# Altium PCB jtag-pcb.PcbDoc
Units mm, origin at the board's own origin, x right, y up, seen from the top; angles counter-clockwise.
Board outline 22 x 48 mm, 2 copper layers (Top Layer, Bottom Layer); 32 components, 31 nets, 176 pads, 59 vias.
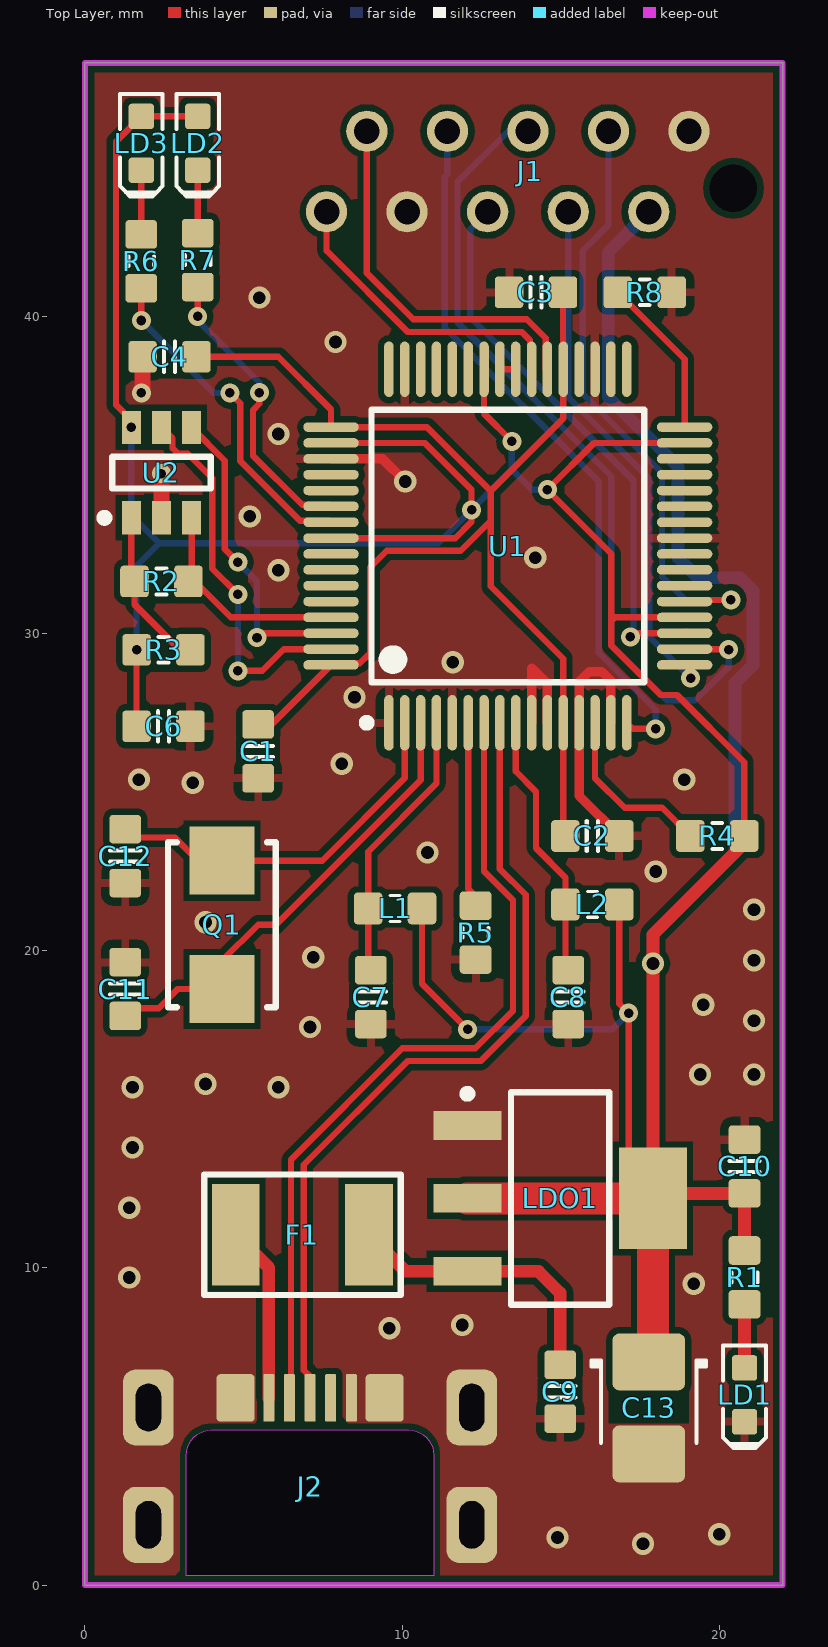
[diagram p0: Top Layer view]
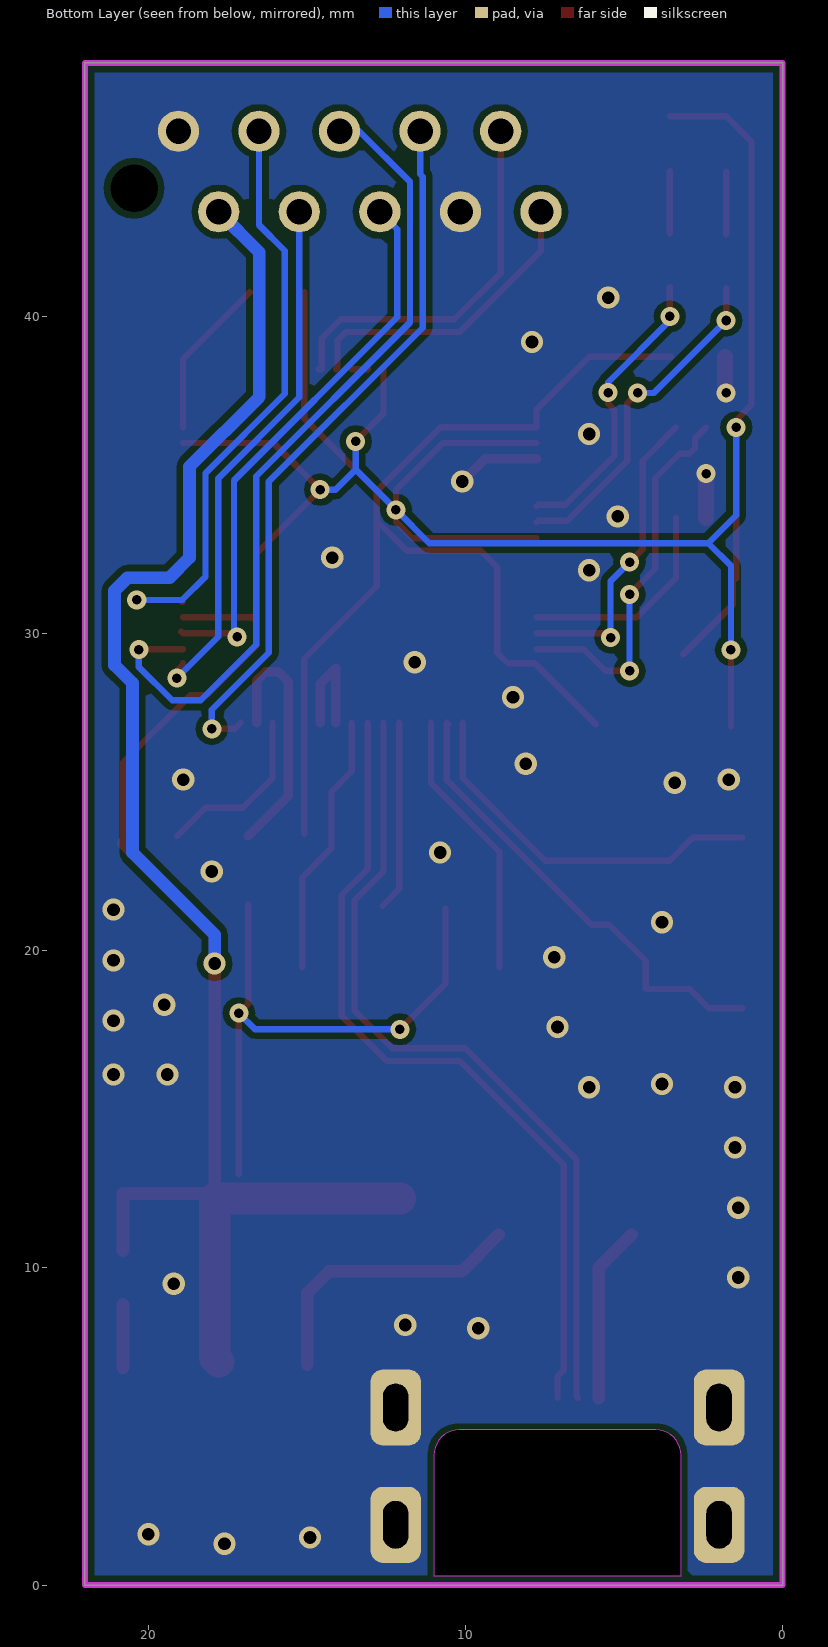
[diagram p1: Bottom Layer view, seen from below]

## Layer stack, top to bottom
Top Solder: solder mask 0.0102, Solder Resist, Dk 3.5
Top Layer: signal copper 0.0356
Dielectric 1: dielectric 0.32, FR-4, Dk 4.8
Bottom Layer: signal copper 0.0356
Bottom Solder: solder mask 0.0102, Solder Resist, Dk 3.5

## Board outline
0,0 22,0 22,48 0,48

## Design rules (kind name [scope] priority, off if disabled: settings)
Clearance [All] p1: gap=0.2
HoleSize [All] p1: absolutevalues=TRUE maxlimit=10 minlimit=0.1 maxpercent=80.000 minpercent=20.000
MinimumSolderMaskSliver [All] p1: minsoldermaskwidth=0.05
PasteMaskExpansion [All] p1: expansion=0.1
PolygonConnect PolygonConnectDirectConnect [All vs IsVia or InComponent('J2') or InComponent('C13') or InComponent('J1') or InComponent('LDO1')] p1: connectstyle=Direct reliefconductorwidth=0.254 reliefentries=4 polygonreliefangle="90 Angle" airgapwidth=0.254
PolygonConnect [All] p2: connectstyle=Relief reliefconductorwidth=0.254 reliefentries=4 polygonreliefangle="90 Angle" airgapwidth=0.254
RoutingVias [All] p1: holewidth=0.3 width=0.6 viastyle="Through Hole" minholewidth=0.3 minwidth=0.6 maxholewidth=3 maxwidth=6
SolderMaskExpansion [All] p1: expansion=0.102
UnpouredPolygon [All] p1: allowunpoured=FALSE
Width [All] p1: maxlimit=3 minlimit=0.2 preferedwidth=0.2
26 further rules are at their usual default settings.

## Components (designator, comment, footprint, x,y, rotation, side; value= is the part's Value field where it differs from the comment)
C1 "100nF" CAPC1608X90N 5.461,26.289 r270 top
C2 "100nF" CAPC1608X90N 16.002,23.622 r0 top
C3 "100nF" CAPC1608X90N 14.224,40.767 r180 top
C4 "3.3uF" CAPC1608X90N 2.667,38.735 r180 top
C6 "100nF" CAPC1608X90N 2.478,27.079 r180 top
C7 "4.7uF" CAPC1608X90N 9.017,18.542 r270 top
C8 "4.7uF" CAPC1608X90N 15.24,18.542 r270 top
C9 "1uF" CAPC1608X90N 14.986,6.096 r270 top
C10 "0.1uF" CAPC1608X90N 20.8,13.2 r90 top
C11 "18pF" CAPC1608X90N 1.27,18.796 r90 top
C12 "18pF" CAPC1608X90N 1.27,22.987 r90 top
C13 "100µ" CAPMP3528X210N 17.78,5.588 r270 top
F1 "MF-MSMF050-2 PTC" PTC-1218 6.858,11.049 r0 top
J1 "HEADER-10" MICRO-MATCH-10 19.05,45.847 r0 top
J2 "USB Micro Type B (recommended if hand soldering)" USB_Micro-B_FCI_SMD 7.1,0.3 r0 top
L1 "120R @ 100 MHz" INDC1608N 9.779,21.336 r0 top
L2 "120R @ 100 MHz" INDC1608N 16.002,21.463 r0 top
LD1 "Red" LED-0603-RED 20.8,6 r270 top
LD2 "Red" LED-0603-RED 3.556,45.466 r270 top
LD3 "Red" LED-0603-RED 1.778,45.466 r270 top
LDO1 "TLV1117-33CDCY" SOT223 14.986,12.192 r0 top
Q1 "12MHz" XTAL-5x3.2 4.318,20.821 r90 top
R1 "Thick Film" RESC1608X55N 20.8,9.7 r270 top
R2 "Thick Film" RESC1608X55N 2.413,31.651 r180 top
R3 "Thick Film" RESC1608X55N 2.478,29.492 r180 top
R4 "Thick Film" RESC1608X55N 19.939,23.622 r0 top
R5 "Thick Film" RESC1608X55N 12.319,20.574 r90 top
R6 "Thick Film" RESC1608X55N 1.778,41.744 r270 top
R7 "Thick Film" RESC1608X55N 3.556,41.783 r270 top
R8 "Thick Film" RESC1608X55N 17.653,40.767 r180 top
U1 "IC_FT2232HL" LQFP-64 13.335,32.766 r90 top
U2 "EEPROM-SOT23-6" SOT23-6-EEPROM 2.413,35.08 r90 top

## Footprints (in the part's own frame and the unit in brackets; to place one, negate y for a bottom-side part, rotate by r counter-clockwise, add the part's x,y. Pads: shape width x height; smd on the part's side, far side on the other; paste and mask are expansions set on the pad)
CAPC1608X90N [mm] "Chip Capacitor, Body 1.6x0.8mm, EIA 0603, IPC Medium Density"
  round 0.254 on Mech15: 0(0,0)
  rrect25% 0.9x1 smd: 1(-0.85,0) 2(0.85,0)
  Top Layer pour cut-out: -0.6,0.5 -0.4,0.7 0.4,0.7 0.6,0.5 0.6,-0.5 0.4,-0.7 -0.4,-0.7 -0.6,-0.5
  silkscreen extent -0.18,-0.48 0.18,0.48, body extent -0.85,-0.45 0.85,0.45, height 0.89
CAPMP3528X210N [mm] "Molded body capacitor, Body 3.5x2.8mm, 1210, IPC Nominal settings"
  round 0.254 on Mech15: 0(0,0)
  rrect25% 1.8x2.3 smd: 1(-1.45,0) 2(1.45,0)
  Top Layer pour cut-out: -0.508,1.27 0.508,1.27 0.508,-1.27 -0.508,-1.27
  silkscreen extent -1.5,-1.8 1.1,1.8, body extent -1.75,-1.4 1.75,1.4, height 2.1
INDC1608N [mm] "Chip bead, Body 1.6x0.8mm, 0603, IPC Medium Density"
  round 0.254 on Mech15: 0(0,0)
  rrect25% 0.9x1 smd: 1(-0.85,0) 2(0.85,0)
  Top Layer pour cut-out: -0.4,0.6 0.4,0.6 0.4,-0.6 -0.4,-0.6
  silkscreen extent -0.15,-0.41 0.15,0.41, body extent -0.8,-0.4 0.8,0.4, height 0.79
LED-0603-RED [mm]
  round 0.254 on Mech15: 0(0,0)
  rrect25% 0.8x0.8 smd: A(-0.85,0) K(0.85,0)
  Top Layer pour cut-out: -0.5,0.5 0.5,0.5 0.5,-0.5 -0.5,-0.5
  silkscreen extent -1.55,-0.67 1.68,0.67, body extent -0.8,-0.4 0.8,0.4, height 0.75
LQFP-64 [mm] "64-Pin LQFP 0.5 mm Pitch"
  oval 1.75x0.3 smd: 1(-5.575,3.75) 2(-5.575,3.25) 3(-5.575,2.75) 4(-5.575,2.25) 5(-5.575,1.75) 6(-5.575,1.25) 7(-5.575,0.75) 8(-5.575,0.25) 9(-5.575,-0.25) 10(-5.575,-0.75) 11(-5.575,-1.25) 12(-5.575,-1.75) 13(-5.575,-2.25) 14(-5.575,-2.75) 15(-5.575,-3.25) 16(-5.575,-3.75) 33(5.575,-3.75) 34(5.575,-3.25) 35(5.575,-2.75) 36(5.575,-2.25) 37(5.575,-1.75) 38(5.575,-1.25) 39(5.575,-0.75) 40(5.575,-0.25) 41(5.575,0.25) 42(5.575,0.75) 43(5.575,1.25) 44(5.575,1.75) 45(5.575,2.25) 46(5.575,2.75) 47(5.575,3.25) 48(5.575,3.75)
  oval 0.3x1.75 smd: 17(-3.75,-5.575) 18(-3.25,-5.575) 19(-2.75,-5.575) 20(-2.25,-5.575) 21(-1.75,-5.575) 22(-1.25,-5.575) 23(-0.75,-5.575) 24(-0.25,-5.575) 25(0.25,-5.575) 26(0.75,-5.575) 27(1.25,-5.575) 28(1.75,-5.575) 29(2.25,-5.575) 30(2.75,-5.575) 31(3.25,-5.575) 32(3.75,-5.575) 49(3.75,5.575) 50(3.25,5.575) 51(2.75,5.575) 52(2.25,5.575) 53(1.75,5.575) 54(1.25,5.575) 55(0.75,5.575) 56(0.25,5.575) 57(-0.25,5.575) 58(-0.75,5.575) 59(-1.25,5.575) 60(-1.75,5.575) 61(-2.25,5.575) 62(-2.75,5.575) 63(-3.25,5.575) 64(-3.75,5.575)
  silkscreen extent -5.7,-4.3 4.3,4.57, body extent -5,-5 5,5, height 1.6
MICRO-MATCH-10 [mm]
  round 1.3 hole 0.8: 1(0,0) 2(-1.27,-2.54) 3(-2.54,0) 4(-3.81,-2.54) 5(-5.08,0) 6(-6.35,-2.54) 7(-7.62,0) 8(-8.89,-2.54)
  round 1.3 hole 0.8 unplated: 9(-10.16,0) 10(-11.43,-2.54)
  round 0 hole 1.5 unplated: drill(1.4,-1.8)
PTC-1218 [mm]
  rect 1.5x3.2 smd: 1(-2.1,0) 2(2.1,0)
  silkscreen extent -3.1,-1.9 3.1,1.9
RESC1608X55N [mm] "Chip Resistor, Body 1.6x0.8mm, EIA 0603, IPC Medium Density"
  round 0.254 on Mech15: 0(0,0)
  rrect25% 0.9x1 smd: 1(-0.85,0) 2(0.85,0)
  Top Layer pour cut-out: -0.6,0.5 -0.4,0.7 0.4,0.7 0.6,0.5 0.6,-0.5 0.4,-0.7 -0.4,-0.7 -0.6,-0.5
  silkscreen extent -0.15,-0.41 0.15,0.41, body extent -0.87,-0.47 0.88,0.48, height 0.54
SOT23-6-EEPROM [mm] "SOT23, 6-Leads, Body 2,90x2,70mm, Pitch 0,95mm, IPC Medium Density"
  rect 1.05x0.6 smd: 1(-1.425,0.95) 2(-1.425,0) 3(-1.425,-0.95) 4(1.425,-0.95) 5(1.425,0) 6(1.425,0.95)
  silkscreen extent -1.55,-1.55 0.5,1.92, body extent -0.9,-1.55 0.9,1.55, height 1.45
SOT223 [mm] "SOT223, 4-Leads, Body 6,50x7,00mm (avg), Pitch 2,30mm, IPC Medium Density"
  rect 2.15x0.9 smd: 1(-2.925,2.3) 2(-2.925,0) 3(-2.925,-2.3)
  rect 2.15x3.2 smd: 4(2.925,0)
  silkscreen extent -3.05,-3.35 1.55,3.42, body extent -1.85,-3.35 1.85,3.35, height 1.8
USB_Micro-B_FCI_SMD [mm]
  round 0.508 on Mech15: 0(0,0)
  rrect20% 0.35x1.5 smd: 1(-1.3,5.6) 2(-0.65,5.6) 3(0,5.6) 4(0.65,5.6) 5(1.3,5.6)
  rrect50% 1.6x2.4 hole 0.8 slot 1.5 at 90 deg: SH(-5.1,1.6) SH(-5.1,5.3) SH(5.1,1.6) SH(5.1,5.3)
  rrect20% 1.2x1.5 smd: SH(-2.35,5.6) SH(2.35,5.6)
  Keep-Out Layer board cut-out: -3.9,0 -3.9,3.797 -3.839,4.103 -3.666,4.362 -3.406,4.536 -3.1,4.597 -3.1,4.597 3.1,4.597 3.406,4.536 3.666,4.362 3.839,4.103 3.9,3.797 3.9,3.797 3.9,0
  body extent -5.35,-21.58 5.35,5.8, height 4.67
XTAL-5x3.2 [mm] "Molded Inductor, 2-Leads, Body 5,00x3,20mm, IPC Medium Density"
  rect 2.15x2.05 smd: 1(-2.025,0) 2(2.025,0)
  silkscreen extent -2.6,-1.7 2.6,1.7, body extent -2.57,-1.68 2.58,1.68, height 1.35

## Part data
C1 C2 C3 C4 C6 C7 C8 C9 C10 C11 C12: library part CAPC_39p_0603_NP0_100V_1%, "Capacitor SMD Cer 39pF 1% 100V NP0 0603"
C13: library part CAPT_100u_1210_6V3, "Capacitor SMD Tantalum 100uF 20% 6.3V 1210"
J2: library part USB_Micro_TypeB_FCI, "Connector SMD-THD USB Micro Type B middle mount"
L1 L2: library part FERRITE_120R-100MHz_0603, "Ferrite bead 120 Ohm at 100 MHz 2A 0603 SMD"
LD1 LD2 LD3: library part LED_SMD_Red_0603_220mcd, "LED 0603 SMD Hyper Red 630nm 220mcd 20mA"
Q1: library part XTAL_5x3.2
R1 R2 R3 R4 R5 R6 R7 R8: library part RES_1K_0603_5%, "Resistor SMD chip 1k Ohm 0.1W 5% 0603"
U1: "Dual High Speed USB to Multipurpose UART/FIFO"

## Via types
v1: diameter 0.7, hole 0.4, Top Layer to Bottom Layer, 37 vias
v2: diameter 0.6, hole 0.3, Top Layer to Bottom Layer, 22 vias

## Nets (pads, with @x,y where several pads share a name; then routed paths per layer and width w, separated by ;. In a path a pad name is that pad's centre, name@x,y a point inside that pad or via, vN(x,y) a via of type N, cw(c..) or ccw(c..) an arc to the next point about the centre after c; other vN are vias at no path point)
DM: J2.2 U1.7 | length 25.9
  Top Layer w0.2: J2.2 6.5,5.95 6.5,13.416 10.01,16.926 12.314,16.926 13.5,18.112 13.5,21.6 12.585,22.515 U1.7
DP: J2.3 U1.8 | length 26
  Top Layer w0.2: J2.3 7.1,6.579 6.9,6.779 6.9,13.25 10.176,16.526 12.479,16.526 13.9,17.947 13.9,21.766 13.085,22.581 U1.8
FTDI_CLK: U1.62 U2.4 | length 9.9
  Top Layer w0.2: U2.4 4.413,35.455 4.413,32.671 v2(4.826,32.258) ; v2(5.426,29.88) 5.562,30.016 U1.62
  Bottom Layer w0.2: v2(4.826,32.258) 5.426,31.658 v2(5.426,29.88)
FTDI_CS: U1.63 U2.5 | length 12.1
  Top Layer w0.2: U2.5 2.763,36.155 2.763,35.845 2.774,35.845 2.939,35.68 3.238,35.68 4.013,34.905 4.013,32.055 v2(4.826,31.242) ; v2(4.826,28.829) 5.588,28.829 6.275,29.516 U1.63
  Bottom Layer w0.2: v2(4.826,28.829) v2(4.826,31.242)
FTDI_DATA: R2.1 U1.61 U2.3 | length 6.8
  Top Layer w0.2: U2.3 3.363,31.751 4.598,30.516 U1.61
GND: C1.2 C2.2 C3.2 C4.2 C6.1 C7.2 C8.2 C9.2 C10.2 C11.2 C12.1 C13.2 J1.1 J1.8 J2.5 J2.SH LD1.K LDO1.1 R5.1 R8.1 U1.1 U1.5 U1.10 U1.11 U1.13 U1.15 U1.25 U1.35 U1.47 U1.51 U2.2 | length 16.8
  Top Layer w0.3: U1.51 9.384,35.516 v1(10.1,34.8) ; U1.10 14.085,28.915 14.585,28.415 U1.11 ; U1.15 16.585,28.515 16.3,28.8 15.9,28.8 15.585,28.485 U1.13 15.585,24.889 C2.2
  Top Layer w0.5: v2@1.817,37.631 C4.2 ; U2.2 v2(2.413,35.052)
  other v1: 17.6,1.3 14.9,1.5 20,1.6 9.6,8.1 11.9,8.2 19.2,9.5 1.4,9.7 1.4,11.9 1.5,13.8 1.5,15.7 6.1,15.7 3.8,15.8 19.4,16.1 21.1,16.1 7.1,17.6 21.1,17.8 19.5,18.3 21.1,19.7 7.2,19.8 3.8,20.9 21.1,21.3 18,22.5 10.8,23.1 3.4,25.3 1.7,25.4 18.9,25.4 8.1,25.9 8.5,28 11.6,29.1 6.1,32 14.2,32.4 5.2,33.7 6.1,36.3 7.9,39.2 5.5,40.6
  other v2: 1.778,37.592
JTAG_TRST: J1.3 U1.21 | length 19.4
  Top Layer w0.2: U1.21@18.926,31 18.992,31.066 v2(20.366,31.066)
  Bottom Layer w0.2: J1.3 16.51,42.89 15.7,42.08 15.7,37.563 18.2,35.063 18.2,31.8 18.934,31.066 v2(20.366,31.066)
NetC1_1: C1.1 C2.1 C3.1 C4.1 U1.12 U1.37 U1.49 U1.64 | length 41.6
  Top Layer w0.2: C4.1 6.096,38.735 7.76,37.071 U1.49 10.786,36.516 12.8,34.502 ; C1.1@5.883,27.139 U1.64 7.81,29.066 8.671,29.066 8.935,29.33 8.935,29.335 9,29.4 9,32.1 9.516,32.616 11.846,32.616 12.792,33.562 12.792,33.692 12.8,33.7 ; U1.37@15.074,38.352 C3.1 ; C2.1@15.085,23.689 U1.12 15.085,29.215 12.8,31.5 12.8,33.7 ; U1.37 15.085,36.787 12.8,34.502 ; 12.8,33.7 12.8,34.502
NetC7_1: C7.1 L1.1 U1.4 | length 8.6
  Top Layer w0.2: C7.1@8.929,19.48 L1.1 8.929,23.129 11.085,25.285 U1.4
NetC8_1: C8.1 L2.1 U1.9 | length 8.4
  Top Layer w0.2: U1.9 13.585,25.658 14.224,25.019 14.224,23.242 15.152,22.314 L2.1 C8.1@15.152,19.48
NetC11_1: C11.1 Q1.1 U1.3 | length 14.7
  Top Layer w0.2: C11.1@1.27,18.193 2.325,18.193 2.928,18.796 Q1.1 4.318,19.685 5.461,20.828 6.027,20.828 10.585,25.386 U1.3 U1.3@10.535,27.141
NetC12_2: C12.2 Q1.2 U1.2 | length 11.9
  Top Layer w0.2: C12.2@1.27,23.576 2.833,23.576 3.563,22.846 Q1.2 7.479,22.846 10.085,25.452 U1.2
NetF1_21: F1.1 J2.1 | length 5.6
  Top Layer w0.4: F1.1 5.8,10.007 J2.1
NetLD1_A: LD1.A R1.2 | length 2
  Top Layer w0.4: LD1.A R1.2
NetLD2_K: LD2.K R7.1 | length 2
  Top Layer w0.2: R7.1 LD2.K@3.556,44.591
NetLD3_K: LD3.K R6.1 | length 2
  Top Layer w0.2: R6.1 LD3.K@1.778,44.577
NetR2_2: R2.2 R3.1 U2.1 | length 4.9
  Top Layer w0.2: R2.2@1.463,31.751 U2.1 ; R2.2 1.563,30.92 R3.1@3.139,29.344
NetR4_1: R4.1 U1.14 | length 5.5
  Top Layer w0.2: U1.14 16.085,25.444 17.018,24.511 18.2,24.511 R4.1
NetR5_2: R5.2 U1.6 | length 6
  Top Layer w0.2: U1.6 12.085,21.951 R5.2@12.612,21.424
NetR8_2: R8.2 U1.32 | length 5.1
  Top Layer w0.2: R8.2 18.91,38.66 U1.32
NetU1_40: U1.40 U1.41 | length 0.5
  Top Layer w0.2: U1.41 U1.40
SCI_RX: J1.9 U1.38 | length 12
  Top Layer w0.2: J1.9 8.89,41.376 10.35,39.916 13.937,39.916 14.535,39.318 14.535,38.341 U1.38 U1.38@14.635,38.341
SCI_TX: J1.10 U1.39 | length 9.7
  Top Layer w0.2: J1.10 7.62,42.08 10.184,39.516 13.771,39.516 14.035,39.252 14.035,38.391 U1.39
SLD1: R7.2 U1.54 | length 9.3
  Top Layer w0.2: v2(3.556,40.005) R7.2 ; v2@5.5,37.5 5.5,37.25 5.3,37.05 5.3,35.615 6.849,34.066 7.71,34.066 U1.54
  Bottom Layer w0.2: v2(3.556,40.005) 3.556,39.878 5.5,37.934 v2@5.5,37.5
  other v2: 5.5,37.6
SLD2: R6.2 U1.55 | length 10.7
  Top Layer w0.2: v2(1.778,39.878) R6.2 ; v2(4.572,37.592) 4.9,37.264 4.9,35.449 6.783,33.566 7.71,33.566 U1.55
  Bottom Layer w0.2: v2(1.778,39.878) 4.064,37.592 v2(4.572,37.592)
TCK: J1.7 U1.16 | length 22.6
  Top Layer w0.2: U1.16 17.276,27 v2(18,27)
  Bottom Layer w0.2: J1.7 11.43,44.496 11.35,44.416 11.35,39.65 16.2,34.8 16.2,30.314 16.2,29.4 18,27.6 v2(18,27)
TDI: J1.4 U1.17 | length 16.9
  Top Layer w0.2: U1.17@18.91,29.066 U1.17 19.1,28.826 v2(19.1,28.6)
  Bottom Layer w0.2: J1.4 15.24,37.457 17.8,34.897 17.8,29.9 v2(19.1,28.6)
TDO: J1.5 U1.18 | length 26.3
  Top Layer w0.2: U1.18 20.284,29.516 v2(20.3,29.5)
  Bottom Layer w0.2: J1.5 13.347,45.847 11.75,44.25 11.75,39.816 16.6,34.966 16.6,30.148 16.6,29.651 18.351,27.9 19.249,27.9 20.3,28.951 v2(20.3,29.5)
TMS: J1.6 U1.19 | length 17.8
  Top Layer w0.2: v2(17.2,29.9) 17.316,30.016 U1.19 U1.19@18.96,30.066
  Bottom Layer w0.2: J1.6 12.15,42.757 12.15,39.981 17.3,34.831 17.3,30.1 17.1,29.9 v2(17.2,29.9)
VCC3: C6.2 C10.1 C13.1 J1.2 L1.2 L2.2 LD2.A LD3.A LDO1.2 LDO1.4 R1.1 R3.2 R4.2 U1.20 U1.31 U1.42 U1.50 U1.56 U2.6 | length 145.5
  Top Layer w0.2: v2(1.463,36.505) 1.463,36.737 0.978,37.222 0.978,45.516 LD3.A LD2.A ; C6.2 v2(1.628,29.492) ; U1.56 11.68,33.016 12.192,33.528 v2(12.192,33.909) 12.192,34.544 10.72,36.016 U1.50 ; L1.2 10.629,18.962 v2(12.065,17.526) ; U1.42 12.585,36.945 v2(13.462,36.068) ; L2.2 16.852,18.327 v2(17.145,18.034) LDO1.4@17.145,12.958 ; U1.20 16.716,30.516 16.6,30.4 ; U1.31 16.054,36.016 v2(14.582,34.544) 16.6,32.526 16.6,30.4 ; R4.2 20.789,25.947 18.669,28.067 18.161,28.067 16.6,29.628 16.6,30.148 16.6,30.4
  Top Layer w0.4: LDO1.4 v1(17.911,19.6) 17.911,20.511 R4.2@20.789,23.389 ; LDO1.4@18.069,12.35 C10.1 R1.1
  Top Layer w1: LDO1.2 LDO1.4 17.911,7.169 C13.1
  Bottom Layer w0.2: v2(1.463,36.505) 1.463,33.737 2.342,32.858 ; v2(1.628,29.492) 1.628,32.144 2.342,32.858 ; v2(12.065,17.526) 16.637,17.526 v2(17.145,18.034) ; v2(13.462,36.068) 13.462,35.179 ; v2(14.582,34.544) 14.097,34.544 13.462,35.179 ; 2.342,32.858 11.141,32.858 v2(12.192,33.909) 13.462,35.179
  Bottom Layer w0.4: J1.2 16.5,42.027 16.5,37.47 18.7,35.27 18.7,32.4 19.334,31.766 20.656,31.766 21.066,31.356 21.066,29.01 20.5,28.444 20.5,23.1 17.911,20.511 v1(17.911,19.6)
VCC5: C9.1 F1.2 LDO1.3 | length 9.1
  Top Layer w0.4: F1.2 10.115,9.892 LDO1.3 14.308,9.892 14.986,9.214 C9.1
pads on no net: C1.0 C2.0 C3.0 C4.0 C6.0 C7.0 C8.0 C9.0 C10.0 C11.0 C12.0 C13.0 J1.drill J2.0 J2.4 L1.0 L2.0 LD1.0 LD2.0 LD3.0 R1.0 R2.0 R3.0 R4.0 R5.0 R6.0 R7.0 R8.0 U1.22 U1.23 U1.24 U1.26 U1.27 U1.28 U1.29 U1.30 U1.33 U1.34 U1.36 U1.43 U1.44 U1.45 U1.46 U1.48 U1.52 U1.53 U1.57 U1.58 U1.59 U1.60

## Polygon pours and split planes (outlines as drawn)
GND on Top Layer "GND Plane" (solid, remove dead copper, pour order 4): 0,0 22,0 22,48 0,48
GND on Bottom Layer "GND BOT" (solid, remove dead copper, pour order 6): 0,0 22,0 22,48 0,48

## Keep-outs
Keep-Out Layer:
  lines w0.2: 22,0 22,48 0,48 0,0 22,0 ; 22,0 22,0